# Altium PCB 3v_i2c_Bean_OLED_Rev1.1.PcbDoc
Units mil, origin at the board's own origin, x right, y up, seen from the top; angles counter-clockwise.
Board outline 735 x 729.08 mil, 2 copper layers (Top Layer, Bottom Layer); 20 components, 17 nets, 63 pads, 4 vias.
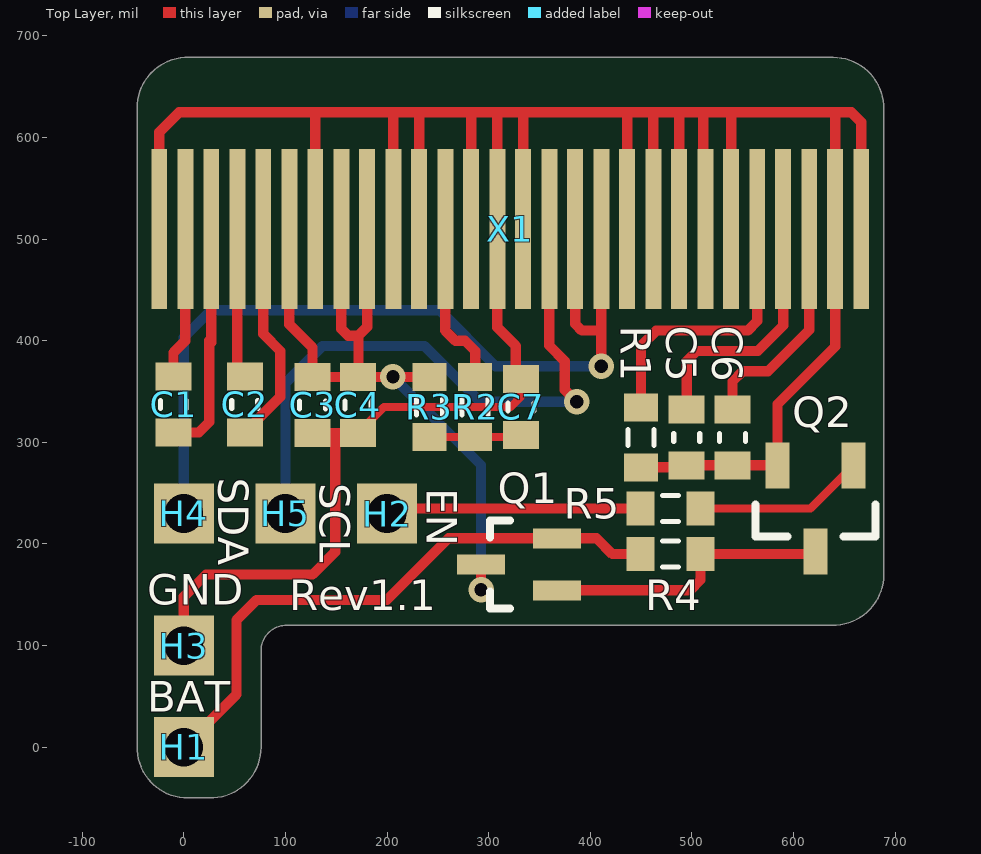
[diagram p0: Top Layer view]
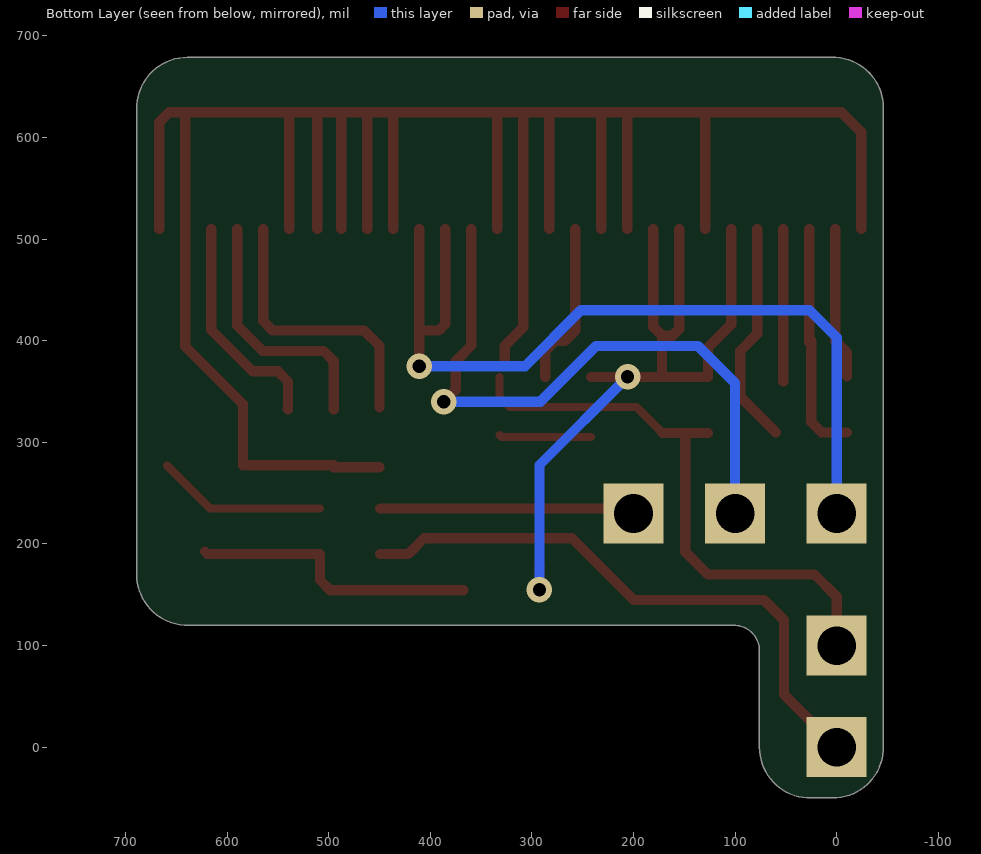
[diagram p1: Bottom Layer view, seen from below]
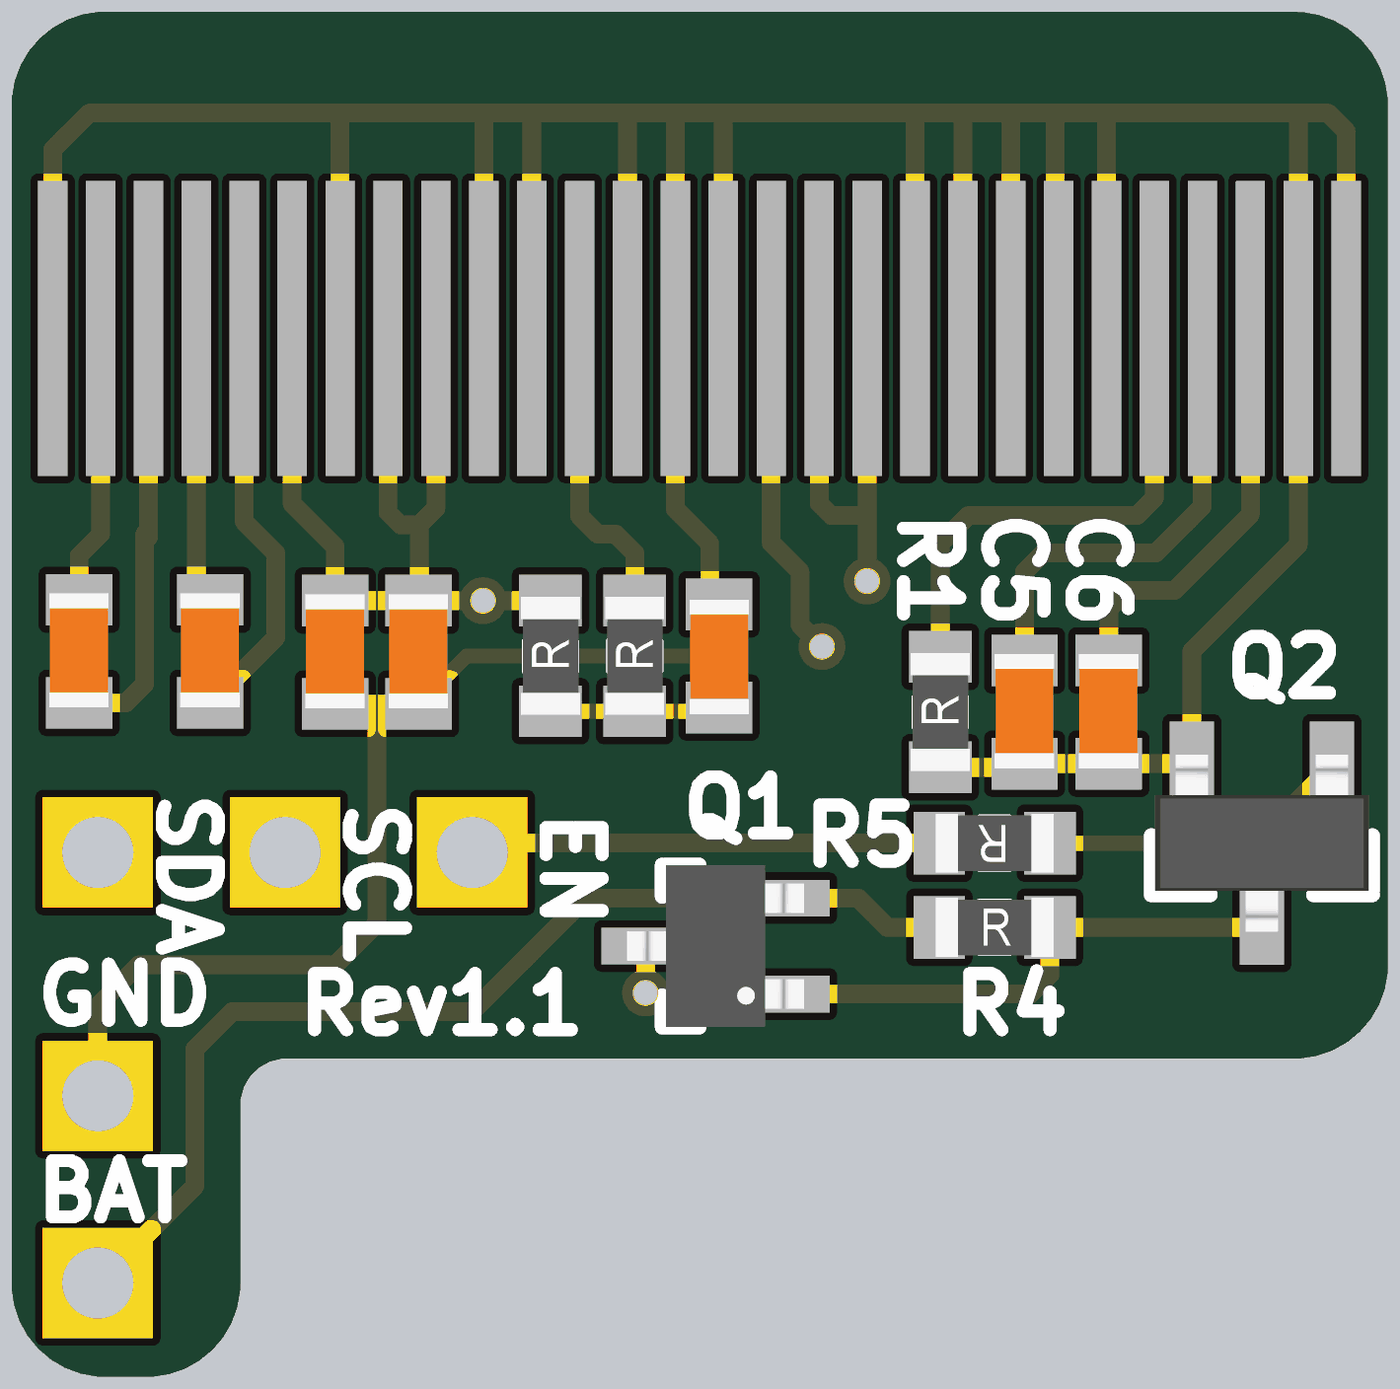
[diagram p2: 3D render of the assembled board from above, using the file's embedded part models]

## Layer stack, top to bottom
Top Solder: solder mask 0.4, Solder Resist, Dk 3.5
Top Layer: signal copper 1.4
Dielectric1: dielectric 12.6, FR-4, Dk 4.8
Bottom Layer: signal copper 1.4
Bottom Solder: solder mask 0.4, Solder Resist, Dk 3.5

## Board outline
-46,1 ccw(c3.99,0) 3.99,-50 25,-50 ccw(c26,-0.01) 76,-0.01 76.06,-0.01 76.06,95 cw(c101.06,95) 101.56,119.99 101.56,119.98 638,120.01 ccw(c639,170) 689,170 688.99,169.93 688.99,628 ccw(c639,629) 639,679 5,679.08 ccw(c4,629.09) -46,629.09

## Design rules (kind name [scope] priority, off if disabled: settings)
Clearance [All] p1: gap=8
MinimumSolderMaskSliver [All] p1: minsoldermaskwidth=3
PolygonConnect [All] p1: connectstyle=Relief reliefconductorwidth=10 reliefentries=4 polygonreliefangle="90 Angle" airgapwidth=10
RoutingVias [All] p1: holewidth=13 width=25 viastyle="Through Hole" minholewidth=13 minwidth=25 maxholewidth=13 maxwidth=25
SilkToSilkClearance [All] p1: silktosilkclearance=3
SilkToSolderMaskClearance [IsPad] p1: minsilkscreentomaskgap=5 clearancetoexposedcopper=TRUE
SolderMaskExpansion [All] p1: expansion=4
UnpouredPolygon [All] p1: allowunpoured=FALSE
Width [All] p1: maxlimit=10 minlimit=8 preferedwidth=10
26 further rules are at their usual default settings.

## Components (designator, comment, footprint, x,y, rotation, side; value= is the part's Value field where it differs from the comment)
C1 "1uF" CAPC1608X09L -10,337.44 r90 top
C2 "1uF" CAPC1608X09L 60,337.44 r90 top
C3 "1uF" CAPC1608X09L 126.77,336.97 r90 top
C4 "1uF" CAPC1608X09L 171.3,336.97 r90 top
C5 "4.7uF" CAPC1608X09L 495,305 r90 top
C6 "2.2uF" CAPC1608X09L 540,305 r90 top
C7 "0.1uF" CAPC1608X09L 331.77,335 r270 top
H1 "CON1" HDR1X1 50,0 r0 top
H2 "CON1" HDR1X1 250,230 r0 top
H3 "CON1" HDR1X1 50,100 r0 top
H4 "CON1" HDR1X1 50,230 r0 top
H5 "CON1" HDR1X1 150,230 r0 top
Q1 "" SC70-LB3_N 329.96,180 r180 top
Q2 "MMBT4401" SOT95P240X110-3N 621.77,235 r270 top
R1 "390K" RESC1608X06L 450,305 r90 top
R2 "10K" RESC1608X06L 286.77,335 r90 top
R3 "10K" RESC1608X06L 241.77,335 r90 top
R4 "100K" RESC1608X06L 479,190 r0 top
R5 "100K" RESC1608X06L 479,235 r180 top
X1 "OLED_GLASS 0.66 inch" "OLED_GLASS 0.66 INCH" 321.3,510 r0 bottom

## Footprints (in the part's own frame and the unit in brackets; to place one, negate y for a bottom-side part, rotate by r counter-clockwise, add the part's x,y. Pads: shape width x height; smd on the part's side, far side on the other; paste and mask are expansions set on the pad)
CAPC1608X09L [mm] "Chip Capacitor, 2-Leads, Body 1.6x0.8mm, IPC High Density (0603 dense)"
  rect 0.7x0.9 smd: 1(-0.7,0) 2(0.7,0)
  silkscreen extent -0.1,-0.33 0.1,0.33, body extent -0.88,-0.48 0.87,0.48, height 1.03
HDR1X1 [mm]
  rect 1.5x1.5 hole 0.965: 1(-1.27,0)
"OLED_GLASS 0.66 INCH" [mm] "OLED_GLASS 0.66 INCH"
  rect 0.4x4 smd far side: 1(-8.775,0) 2(-8.125,0) 3(-7.475,0) 4(-6.825,0) 5(-6.175,0) 6(-5.525,0) 7(-4.875,0) 8(-4.225,0) 9(-3.575,0) 10(-2.925,0) 11(-2.275,0) 12(-1.625,0) 13(-0.975,0) 14(-0.325,0) 15(0.325,0) 16(0.975,0) 17(1.625,0) 18(2.275,0) 19(2.925,0) 20(3.575,0) 21(4.225,0) 22(4.875,0) 23(5.525,0) 24(6.175,0) 25(6.825,0) 26(7.475,0) 27(8.125,0) 28(8.775,0)
RESC1608X06L [mm] "Chip Resistor, 2-Leads, Body 1.6x0.8mm, IPC High Density (0603 dense)"
  rect 0.7x0.85 smd: 1(-0.75,0) 2(0.75,0)
  silkscreen extent -0.2,-0.33 0.2,0.33, body extent -0.8,-0.4 0.8,0.4, height 0.55
SC70-LB3_N [mm] "SOT323, 3-Leads, Body 2.0x1.3mm, Pitch 0.65mm, Lead Span 2.1mm, IPC Medium Density"
  rect 1.2x0.5 smd: 1(-0.95,0.65) 2(-0.95,-0.65) 3(0.95,0)
  silkscreen extent 0.23,-1.1 0.73,1.1, body extent -1.2,-1.1 1.2,1.1, height 1
SOT95P240X110-3N [mm] "SOT23, 3-Leads, Body 3.0x2.5mm (max), Pitch 0.95mm, IPC Medium Density"
  rect 1.15x0.6 smd: 1(-1.075,0.95) 2(-1.075,-0.95) 3(1.075,0)
  silkscreen extent -0.1,-1.5 0.7,1.5, body extent -1.2,-1.45 1.2,1.45, height 0.99

## Part data
C1 C2 C3 C4 C5 C6 C7: library part CAP_0603, "CAP 0603"
H1 H2 H3 H4 H5: "CONN HEADER 1POS .100\" PADS"
Q1: library part SI1307EDL-T1-E3, "MOSFET P-CH 12V 850MA SOT323-3"
Q2: "TRANSISTOR GP NPN AMP SOT-23"
R1 R2 R3: library part RES_0603, "RES 0603"
R4 R5: library part RES_0603, "RES 100K OHM 1/10W 1% 0603 SMD"
X1: "0.66 inch OLED_GLASS"

## Via types
v1: diameter 25, hole 13, Top Layer to Bottom Layer, tented both sides, 4 vias

## Nets (pads, with @x,y where several pads share a name; then routed paths per layer and width w, separated by ;. In a path a pad name is that pad's centre, name@x,y a point inside that pad or via, vN(x,y) a via of type N, cw(c..) or ccw(c..) an arc to the next point about the centre after c; other vN are vias at no path point)
GND: C3.1 C4.1 C5.1 C6.1 C7.1 H3.1 Q2.2 R1.1 X1.1 X1.7 X1.10 X1.11 X1.13 X1.14 X1.15 X1.19 X1.20 X1.21 X1.22 X1.23 X1.27 X1.28 | length 3386.4
  Top Layer w8: C4.1@171.77,309.88 196.89,335 321.77,335 331.77,345 C7.1 C7.1@331.77,364.53
  Top Layer w10: X1.1 -24.17,605.39 -4.57,625 511.26,625 ; H3.1 0,148.23 21.77,170 126.77,170 149.04,192.26 149.04,309.41 ; C3.1 149.04,309.41 ; X1.7 129.37,625 ; C4.1@171.77,309.88 C4.1 149.04,309.41 ; X1.10 206.14,625 ; X1.11 231.73,625 ; X1.13 282.91,625 ; 308.5,625 X1.14 308.5,413.27 326.77,395 C7.1@326.77,375 ; X1.15 334.09,625 ; X1.19 436.46,625 ; R1.1 495,275.47 C5.1 C6.1 Q2.2@580,277.44 ; X1.20 462.05,625 ; X1.21 487.64,625 ; X1.22@511.26,510 511.26,625 ; X1.23 538.82,625 ; Q2.2 584.37,337.6 641.18,394.41 X1.27 641.18,625 ; X1.28 666.77,615.24 657.01,625 538.82,625 ; 511.26,625 538.82,625
NetC1_1: C1.1 X1.3 | length 230.7
  Top Layer w10: C1.1 14.88,309.88 25,320 25,400 ; 27.01,398.5 X1.3
NetC1_2: C1.2 X1.2 | length 149.7
  Top Layer w10: C1.2 -10,388.58 1.42,400 X1.2
NetC2_1: C2.1 X1.5 | length 221.6
  Top Layer w10: C2.1 95,344.88 95,390 78.19,406.81 X1.5
NetC2_2: C2.2 X1.4 | length 150
  Top Layer w10: C2.2@52.6,360 X1.4
NetC5_2: C5.2 X1.25 | length 251.9
  Top Layer w10: C5.2 495,380 505,390 565,390 590,415 590,435 X1.25
NetC6_2: C6.2 X1.26 | length 224.2
  Top Layer w10: C6.2@540.59,333.15 C6.2 540,360 550,370 575,370 615.59,410.59 X1.26
NetC7_2: C7.2 R2.1 R3.1 | length 90.8
  Top Layer w8: R3.1 R2.1 329.8,305.47 C7.2
NetH1_1: H1.1 Q1.2 R4.1 | length 584
  Top Layer w10: H1.1 51.77,51.77 51.77,125 71.77,145 185,145 200,145 260.59,205.59 Q1.2 406.18,205.59 421.77,190 R4.1
NetH2_1: H2.1 R5.2 | length 251.5
  Top Layer w10: H2.1 205,235 R5.2
NetH4_1: H4.1 X1.17 X1.18 | length 882.4
  Top Layer w10: X1.17 385.28,416.5 391.77,410 410.87,410 ; X1.18 410.87,410 ; v1@411.77,367.77 410.87,368.68 v1(410.87,375) 410.87,410
  Bottom Layer w10: H4.1 0,403.23 26.77,430 251.77,430 306.77,375 v1(410.87,375)
NetH5_1: H5.1 X1.16 | length 639.2
  Top Layer w10: X1.16 359.69,395.31 375,380 375,351.77 v1(386.77,340) v1@391.77,340
  Bottom Layer w10: H5.1 100,358.23 136.77,395 236.77,395 291.77,340 v1(386.77,340)
NetQ1_1: Q1.1 Q2.3 R4.2 | length 285.2
  Top Layer w10: Q1.1 498.41,154.41 508.53,164.53 R4.2 619.09,190 Q2.3
NetQ2_1: Q2.1 R5.1 | length 168.2
  Top Layer w8: R5.1 616.85,235 Q2.1
NetR1_2: R1.2 X1.24 | length 275.6
  Top Layer w10: R1.2 450,370 450,395 465,410 555,410 564.41,419.41 X1.24
NetR2_2: R2.2 X1.12 | length 163.2
  Top Layer w10: X1.12 257.32,410 267.32,400 276.77,400 286.77,390 R2.2
OLED_V+: C3.2 C4.2 Q1.3 R3.2 X1.6 X1.8 X1.9 | length 807.6
  Top Layer w10: X1.6 103.78,416.22 126.77,393.23 C3.2 C4.2 ; X1.8 154.96,411.81 161.77,405 171.77,405 ; X1.9 180.55,413.78 171.77,405 ; R3.2 v1(205.77,364.53) C4.2 ; v1(292.56,155) Q1.3 ; C4.2 171.77,365 171.77,405
  Bottom Layer w10: v1(205.77,364.53) 292.56,277.74 v1(292.56,155)

## Silkscreen, mask and mechanical layers (free items; w line width, h text height)
Top Overlay:
  text "SDA" at 34,265 h30 r270
  text "SCL" at 134,260 h30 r270
  text "EN" at 239,255 h30 r270
  text "GND" at -36,140 h30
  text "Rev1.1" at 104,135 h30
  text "BAT" at -36,35 h30
Board_Outline:
  lines w10: 76,-0.01 cw(c26,-0.01) 25,-50 3.99,-50 cw(c3.99,0) -46,1 -46,629.09 cw(c4,629.09) 5,679.08 639,679 cw(c639,629) 688.99,628 688.99,169.93 ; 76.06,-0.01 76.06,95 cw(c101.06,95) 101.56,119.99 638,120.01 ccw(c639,170) 689,170